# Altium PCB PCB1.PcbDoc
Units mil, origin at the board's own origin, x right, y up, seen from the top; angles counter-clockwise.
Board outline 820 x 2400 mil, 2 copper layers (Top Layer, Bottom Layer); 3 components, 13 nets, 20 pads, 0 vias.
Unrouted connection lines stored in the file: 3.
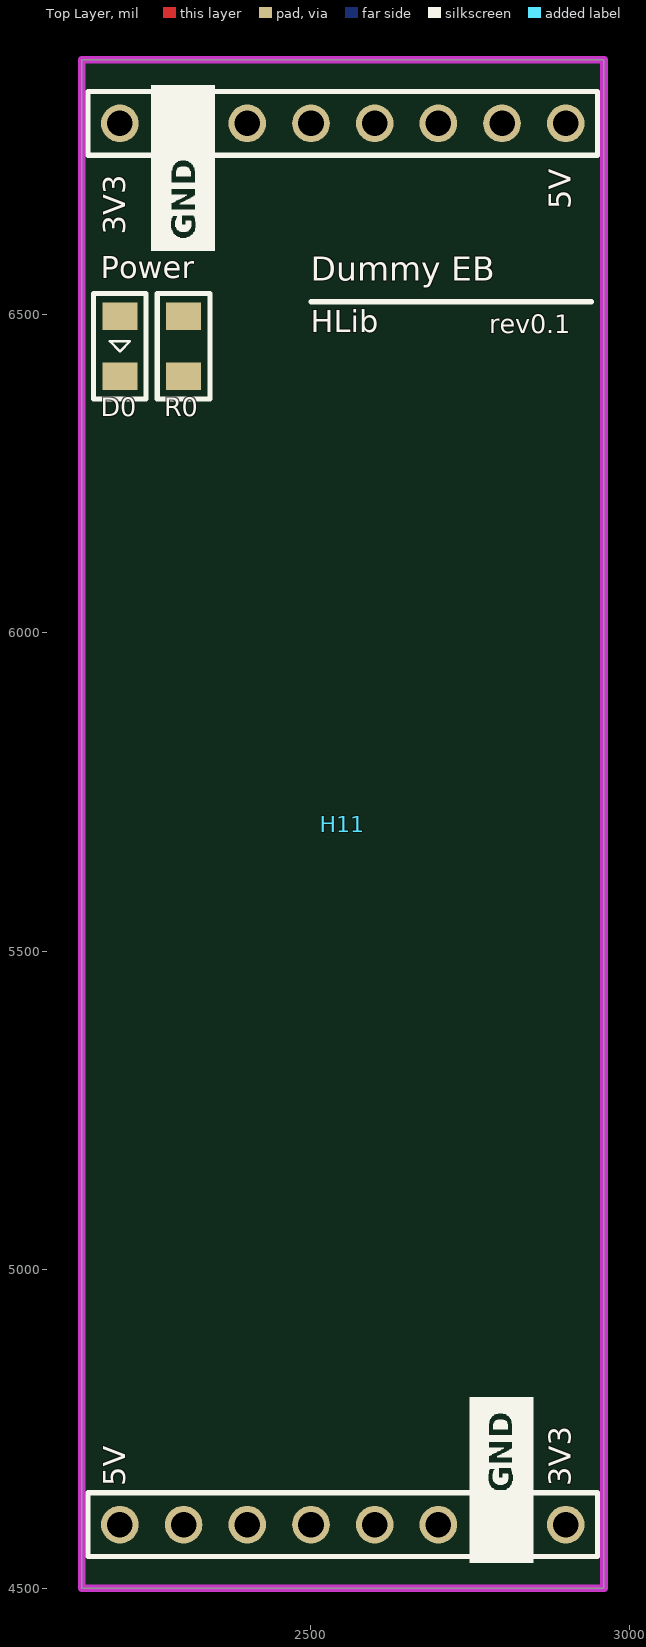
[diagram p0: Top Layer view]
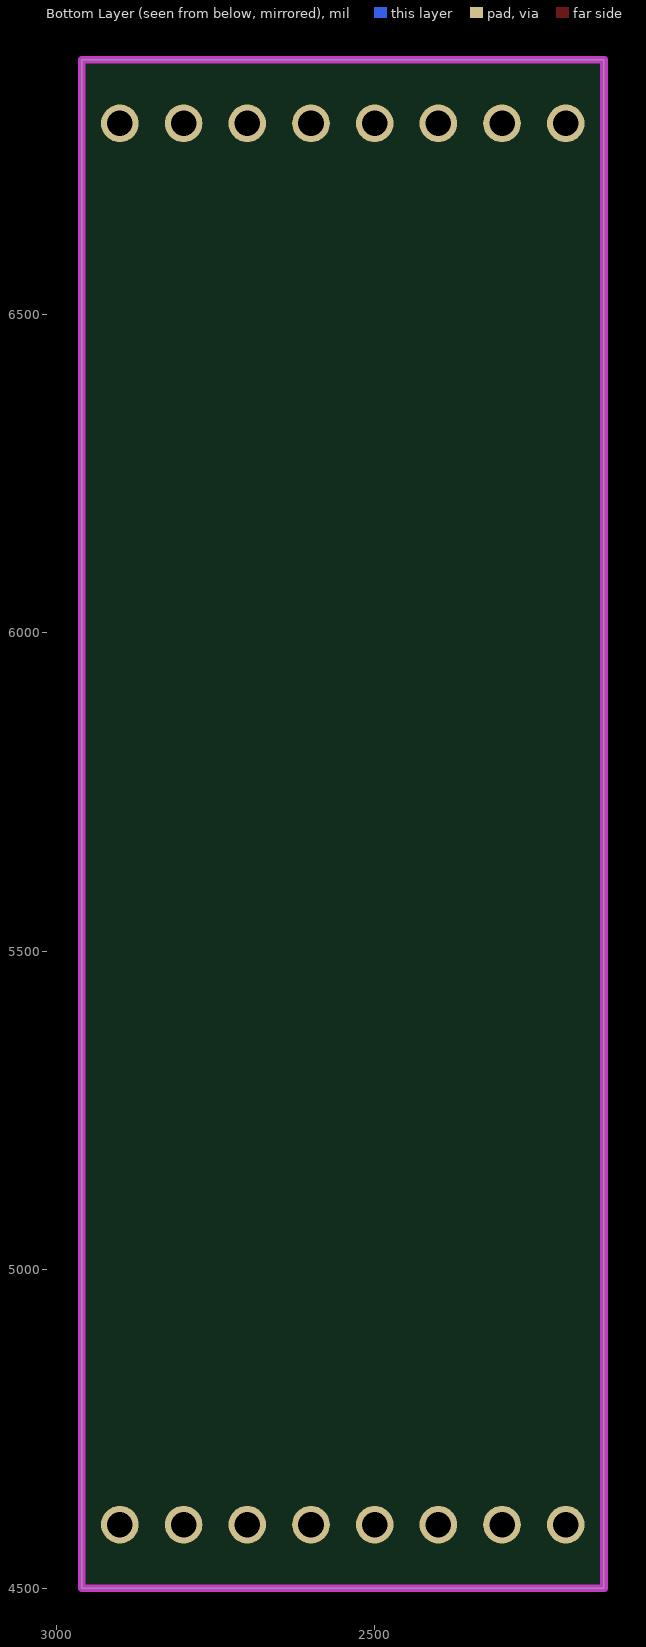
[diagram p1: Bottom Layer view, seen from below]

## Layer stack, top to bottom
Top Layer: signal copper 1.4
Dielectric: dielectric 12.6, FR-4, Dk 4.8
Bottom Layer: signal copper 1.4

## Board outline
2140,4500 2140,6900 2960,6900 2960,4500

## Design rules (kind name [scope] priority, off if disabled: settings)
Clearance [InPolygon] p1: gap=15
Clearance Clearance_1 [All] p2: gap=10
DiffPairsRouting [All] p1: maxlimit=10 minlimit=10 mostfreqgap=10 maxuncoupledlength=500
PolygonConnect [All] p1: connectstyle=Relief reliefconductorwidth=10 reliefentries=4 polygonreliefangle="90 Angle" airgapwidth=10
RoutingVias [All] p1: holewidth=25 width=40 viastyle="Through Hole" minholewidth=28 minwidth=50 maxholewidth=28 maxwidth=50
SolderMaskExpansion [All] p1: expansion=4
Width [All] p1: maxlimit=25 minlimit=8 preferedwidth=10
27 further rules are at their usual default settings.

## Classes and differential pairs
differential pair CAN: +CAN_P -CAN_N

## Components (designator, comment, footprint, x,y, rotation, side; value= is the part's Value field where it differs from the comment)
D0 "LED" SM_0805_LED 2200,6450 r270 top
H11 "MBoard1_BH_DualPorts" MBoard1_BH_DualPorts 2200,6800 r0 top
R0 "R" SM_0805_R 2300,6450 r270 top

## Footprints (in the part's own frame and the unit in brackets; to place one, negate y for a bottom-side part, rotate by r counter-clockwise, add the part's x,y. Pads: shape width x height; smd on the part's side, far side on the other; paste and mask are expansions set on the pad)
MBoard1_BH_DualPorts [mm]
  round 1.5 hole 1.02: 1(0,0) 2(2.54,0) 3(5.08,0) 4(7.62,0) 5(10.16,0) 6(12.7,0) 7(15.24,0) 8(17.78,0) 9(17.78,-55.88) 10(15.24,-55.88) 11(12.7,-55.88) 12(10.16,-55.88) 13(7.62,-55.88) 14(5.08,-55.88) 15(2.54,-55.88) 16(0,-55.88)
  silkscreen extent -1.27,-57.15 19.05,1.27, body extent -1.27,-57.15 19.05,1.27, height 8
SM_0805_LED [mm] "General polarized surface-mount Led, low density"
  rect 1.1x1.4 smd: 1(-1.2,0) 2(1.2,0)
  silkscreen extent -2.1,-1.05 2.1,1.05, body extent -1.01,-0.62 1.01,0.63, height 1.1
SM_0805_R [mm] "General Surface-mount resistor, low density"
  rect 1.1x1.4 smd: 1(-1.2,0) 2(1.2,0)
  silkscreen extent -2.1,-1.05 2.1,1.05, body extent -1,-0.63 1,0.62, height 0.45

## Part data
R0: "Resistor"

## Nets (pads, with @x,y where several pads share a name; then routed paths per layer and width w, separated by ;. In a path a pad name is that pad's centre, name@x,y a point inside that pad or via, vN(x,y) a via of type N, cw(c..) or ccw(c..) an arc to the next point about the centre after c; other vN are vias at no path point)
3V3: D0.1 H11.1
CAN_N: 
CAN_P: 
CAN_RX: 
CAN_TX: 
GND: H11.2 R0.1
NetC2_2: 
NetCOM0_5: 
NetCOM0_9: 
NetD0_2: D0.2 R0.2
NetH11_3: H11.3
NetH11_4: H11.4
NetJ20_2: 
pads on no net: H11.5 H11.6 H11.7 H11.8 H11.9 H11.10 H11.11 H11.12 H11.13 H11.14 H11.15 H11.16

## Keep-outs
Keep-Out Layer:
  the board outline again, w12

## Silkscreen, mask and mechanical layers (free items; w line width, h text height)
Top Overlay:
  drawing of 607 lines, arcs and shapes, not listed
  text "5V" at 2920,6665 h60 r90
  text "3V3" at 2220,6625 h60 r90
  text "Power" at 2170,6545 h60
  text "Dummy EB" at 2500,6540 h65
  text "HLib" at 2500,6460 h60
  text "rev0.1" at 2780,6460 h50
  text "5V" at 2220,4660 h60 r90
  text "3V3" at 2920,4660 h60 r90
Drill Drawing:
  text ".LEGEND" at 7200,3200 h60
  text "Drill Drawing." at 7200,3100 h60

## Dimensions
2140,4500 to 2140,6900 on Mechanical 1
2140,4500 to 2960,4500 on Mechanical 1